# EAGLE board LED-Lamp-pth-v2 (EAGLE 7.6.0)
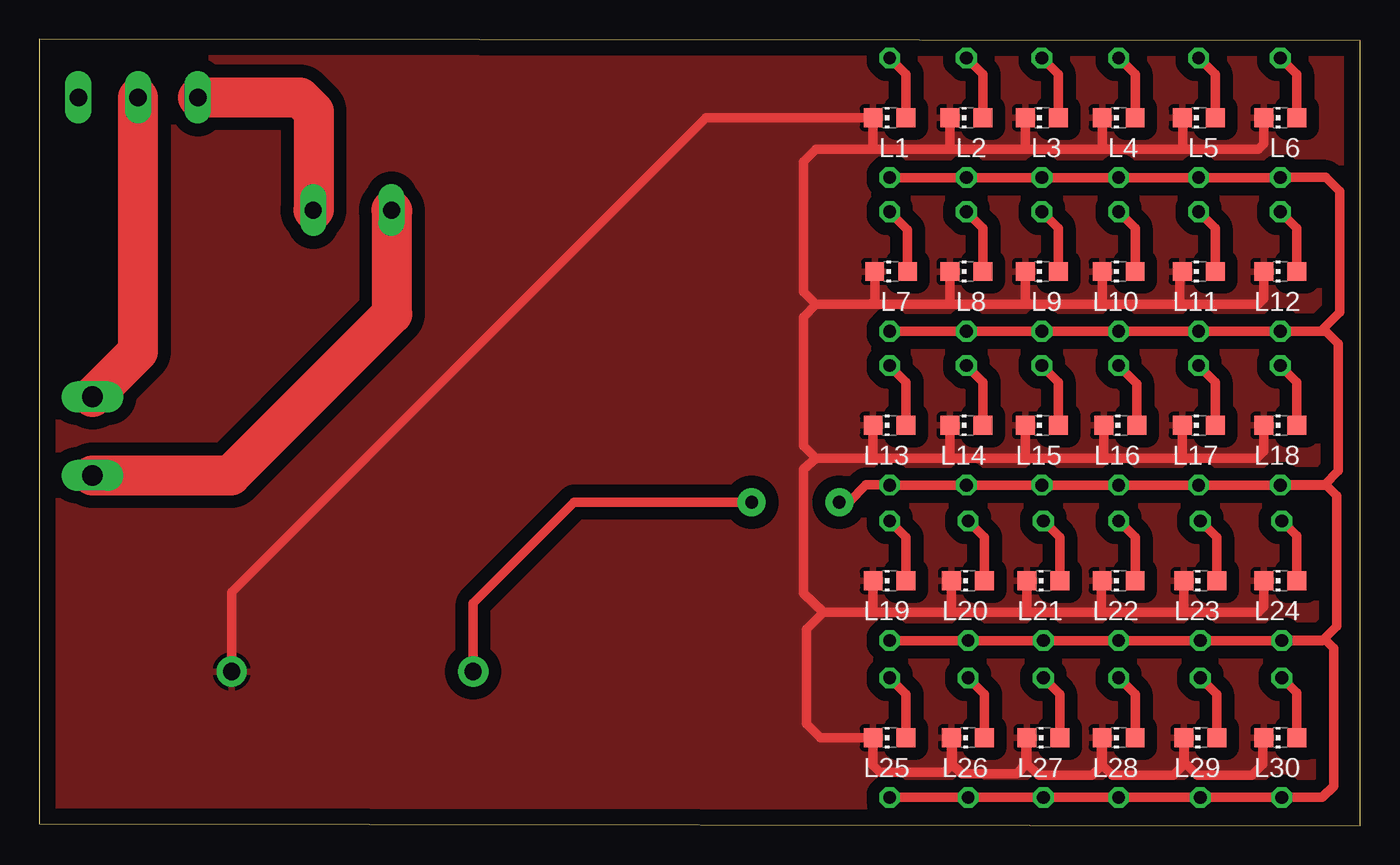
[diagram p0: board, top side]
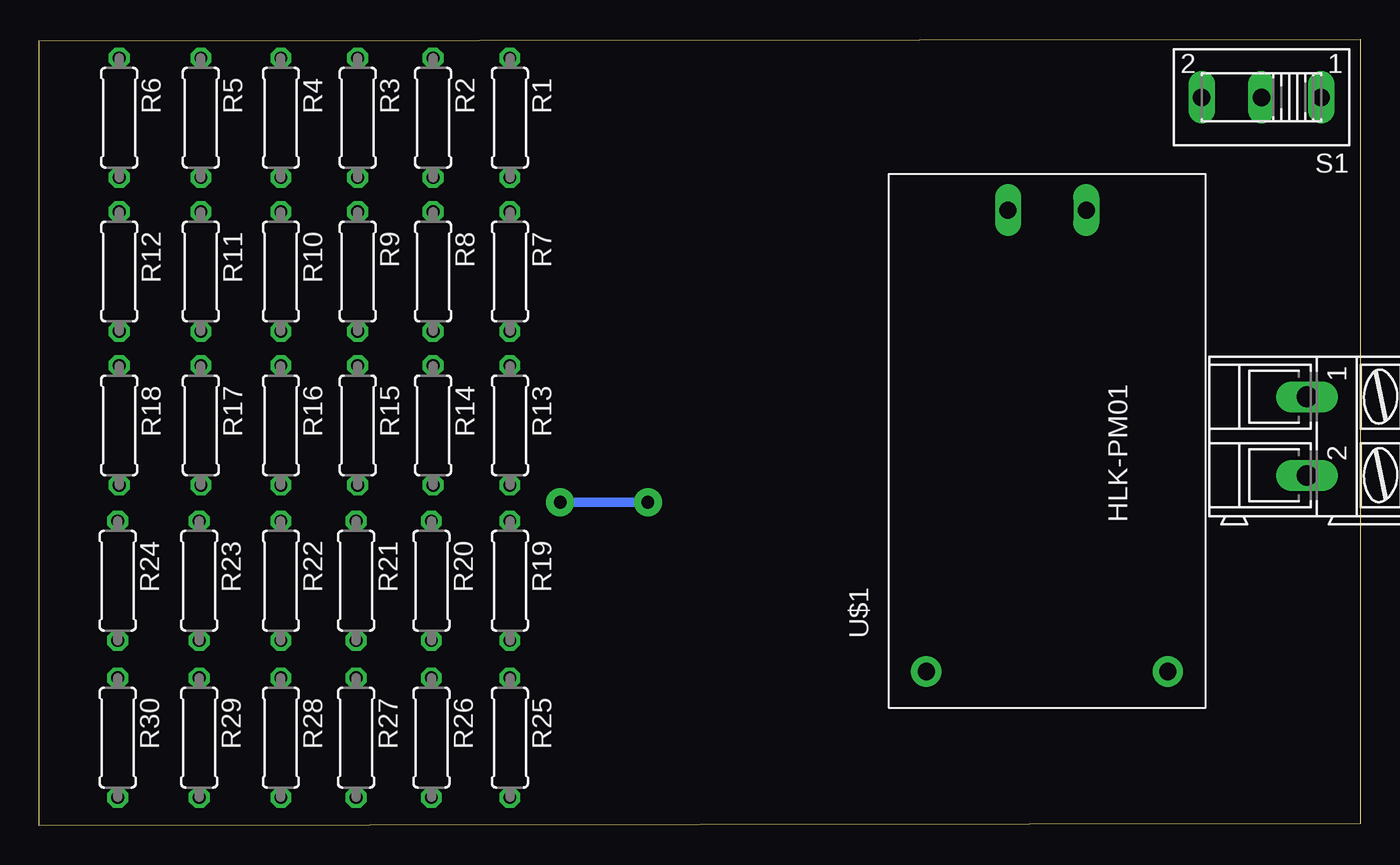
[diagram p1: board, bottom side, seen from below]

Size 84.2 x 50.1 mm. Coordinates in mm from the lower left corner, seen from the top.
Outline: 0,0.1 84.2,0 84.2,50 0,50.1 0,0.1
Copper layers (1*16): Top 0.035mm / dielectric 1.5mm / Bottom 0.035mm
Design rules "default": minimum track width 10mil, minimum drill 24mil, track to track 8mil, track to pad 8mil, pad to pad 8mil, via to via 8mil, smd to smd 8mil, copper to edge 40mil, drill to drill 8mil, minimum pad ring 10mil, minimum via ring 8mil, stop-mask expansion 4mil, vias tented up to drill 0mil, thermal gap 10mil

## Footprints (pad centres in the part's own frame; a part is rotated, then mirrored left to right if it is on the bottom)
CHIP-LED0805 = smd 1.2 x 1.2: A 0,-1.05; C 0,1.05
0207/7 = drill 0.813 octagon: 1 -3.81,0; 2 3.81,0
255SB = drill 1.118 long: 1 -3.81,0; 2 0,0; 3 3.81,0
HLK-PM01 = drill 1.1 pad 1.93: +5V 15.19,-7.76; GND 15.19,7.64 | drill 1.1 long: AC1 -14.21,2.44; AC2 -14.21,-2.56
AK300/2 = drill 1.321 long: 1 -2.515,0; 2 2.489,0

## Placement (x,y rotation side)
L1  [CHIP-LED0805]  54.2,45.1 90 top
L2  [CHIP-LED0805]  59.1,45.1 90 top
L3  [CHIP-LED0805]  63.9,45.1 90 top
L4  [CHIP-LED0805]  68.8,45.1 90 top
L5  [CHIP-LED0805]  73.9,45.1 90 top
L6  [CHIP-LED0805]  79.1,45.1 90 top
L7  [CHIP-LED0805]  54.3,35.3 90 top
L8  [CHIP-LED0805]  59.1,35.3 90 top
L9  [CHIP-LED0805]  63.9,35.3 90 top
L10  [CHIP-LED0805]  68.8,35.3 90 top
L11  [CHIP-LED0805]  73.9,35.3 90 top
L12  [CHIP-LED0805]  79.1,35.3 90 top
L13  [CHIP-LED0805]  54.2,25.5 90 top
L14  [CHIP-LED0805]  59.1,25.5 90 top
L15  [CHIP-LED0805]  63.9,25.5 90 top
L16  [CHIP-LED0805]  68.9,25.5 90 top
L17  [CHIP-LED0805]  73.9,25.5 90 top
L18  [CHIP-LED0805]  79.1,25.5 90 top
L19  [CHIP-LED0805]  54.2,15.6 90 top
L20  [CHIP-LED0805]  59.2,15.6 90 top
L21  [CHIP-LED0805]  64,15.6 90 top
L22  [CHIP-LED0805]  68.8,15.6 90 top
L23  [CHIP-LED0805]  74,15.6 90 top
L24  [CHIP-LED0805]  79.1,15.6 90 top
L25  [CHIP-LED0805]  54.2,5.6 90 top
L26  [CHIP-LED0805]  59.2,5.6 90 top
L27  [CHIP-LED0805]  64,5.6 90 top
L28  [CHIP-LED0805]  68.8,5.6 90 top
L29  [CHIP-LED0805]  74,5.6 90 top
L30  [CHIP-LED0805]  79.1,5.6 90 top
R1  [0207/7]  54.2,45.1 270 bottom
R2  [0207/7]  59.1,45.1 270 bottom
R3  [0207/7]  63.9,45.1 270 bottom
R4  [0207/7]  68.8,45.1 270 bottom
R5  [0207/7]  73.9,45.1 270 bottom
R6  [0207/7]  79.1,45.1 270 bottom
R7  [0207/7]  54.2,35.3 270 bottom
R8  [0207/7]  59.1,35.3 270 bottom
R9  [0207/7]  63.9,35.3 270 bottom
R10  [0207/7]  68.8,35.3 270 bottom
R11  [0207/7]  73.9,35.3 270 bottom
R12  [0207/7]  79.1,35.3 270 bottom
R13  [0207/7]  54.2,25.5 270 bottom
R14  [0207/7]  59.1,25.5 270 bottom
R15  [0207/7]  63.9,25.5 270 bottom
R16  [0207/7]  68.8,25.5 270 bottom
R17  [0207/7]  73.9,25.5 270 bottom
R18  [0207/7]  79.1,25.5 270 bottom
R19  [0207/7]  54.2,15.6 270 bottom
R20  [0207/7]  59.2,15.6 270 bottom
R21  [0207/7]  64,15.6 270 bottom
R22  [0207/7]  68.8,15.6 270 bottom
R23  [0207/7]  74,15.6 270 bottom
R24  [0207/7]  79.2,15.6 270 bottom
R25  [0207/7]  54.2,5.6 270 bottom
R26  [0207/7]  59.2,5.6 270 bottom
R27  [0207/7]  64,5.6 270 bottom
R28  [0207/7]  68.8,5.6 270 bottom
R29  [0207/7]  74,5.6 270 bottom
R30  [0207/7]  79.2,5.6 270 bottom
S1  [255SB]  6.3,46.4 180 bottom
U$1  HLK-PM01  [HLK-PM01]  19.9,25 270 bottom
X1  [AK300/2]  3.4,24.8 270 bottom

## Library data of the parts
L1-L30 = led
R1-R30 = rcl
S1 = switch
U$1 = HLK-PM01
X1 = con-ptr500; OC_FARNELL: unknown; OC_NEWARK: unknown

## Nets
GND: L1.C L2.C L3.C L4.C L5.C L6.C L7.C L8.C L9.C L10.C L11.C L12.C L13.C L14.C L15.C L16.C L17.C L18.C L19.C L20.C L21.C L22.C L23.C L24.C L25.C L26.C L27.C L28.C L29.C L30.C U$1.GND
N$1: L2.A R2.1
N$2: L3.A R3.1
N$3: L4.A R4.1
N$4: L5.A R5.1
N$5: L6.A R6.1
N$6: L7.A R7.1
N$7: L8.A R8.1
N$8: L9.A R9.1
N$9: L10.A R10.1
N$10: L11.A R11.1
N$11: L12.A R12.1
N$12: L13.A R13.1
N$13: L14.A R14.1
N$14: L15.A R15.1
N$15: L16.A R16.1
N$16: L17.A R17.1
N$17: L18.A R18.1
N$18: L19.A R19.1
N$19: L20.A R20.1
N$20: L21.A R21.1
N$21: L22.A R22.1
N$22: L23.A R23.1
N$23: L24.A R24.1
N$24: L25.A R25.1
N$25: L26.A R26.1
N$26: L27.A R27.1
N$27: S1.2 X1.1
N$28: L28.A R28.1
N$29: U$1.AC2 X1.2
N$30: L29.A R29.1
N$31: L1.A R1.1
N$32: L30.A R30.1
N$33: R1.2 R2.2 R3.2 R4.2 R5.2 R6.2 R7.2 R8.2 R9.2 R10.2 R11.2 R12.2 R13.2 R14.2 R15.2 R16.2 R17.2 R18.2 R19.2 R20.2 R21.2 R22.2 R23.2 R24.2 R25.2 R26.2 R27.2 R28.2 R29.2 R30.2 U$1.+5V
N$34: S1.3 U$1.AC1

## Tracks (layer width: path | path; a pad name or v marks a point on that pad's centre or on a via)
GND
  Top 0.61: L30.C 78,5.55 78,3.9 77.3,3.2 73.8,3.2 72.95,4.05 L29.C 73,5.55 73,3.9 72.3,3.2 68.4,3.2 67.75,3.85 L28.C 67.7,5.55 67.7,3.8 67.1,3.2 63.7,3.2 62.95,3.95 L27.C 62.9,5.55 62.9,3.9 62.3,3.3 58.8,3.3 58.15,3.95 L26.C 58.2,5.55 58.2,3.9 57.7,3.4 53.6,3.4 53.15,3.85 L25.C 49.8,5.6 48.9,6.5 48.9,12.5 50,13.6 | L24.C 78.05,13.95 77.7,13.6 73.1,13.6 | 73.1,13.6 67.8,13.6 | 67.8,13.6 63.1,13.6 | 63.1,13.6 58.1,13.6 | 58.1,13.6 53,13.6 | 53,13.6 50,13.6 | L19.C 53.15,13.75 53,13.6 | L20.C 58.15,13.65 58.1,13.6 | L21.C 62.95,13.75 63.1,13.6 | L22.C 67.75,15.55 67.7,15.5 67.7,13.7 67.8,13.6 | L23.C 72.95,13.75 73.1,13.6 | L18.C 78.05,23.85 77.6,23.4 72.9,23.4 | 72.9,23.4 67.6,23.4 | 67.6,23.4 62.9,23.4 | 62.9,23.4 58.2,23.4 | 58.2,23.4 53.1,23.4 | 53.1,23.4 49.5,23.4 | 49.5,23.4 48.7,22.7 48.7,14.8 50,13.6 | L13.C 53.15,23.45 53.1,23.4 | L14.C 58.05,23.55 58.2,23.4 | L15.C 62.85,23.45 62.9,23.4 | L16.C 67.85,23.65 67.6,23.4 | L17.C 72.85,23.45 72.9,23.4 | L12.C 78.05,33.55 77.7,33.2 72.8,33.2 | 72.8,33.2 67.9,33.2 | 67.9,33.2 63.1,33.2 | 63.1,33.2 58.1,33.2 | 58.1,33.2 53,33.2 | 53,33.2 49.5,33.2 | 49.5,33.2 48.7,32.4 48.7,24.2 49.5,23.4 | L7.C 53.25,33.45 53,33.2 | L8.C 58.05,33.25 58.1,33.2 | L9.C 62.85,33.45 63.1,33.2 | L10.C 67.75,33.35 67.9,33.2 | L11.C 72.8,35.3 72.7,35.2 72.7,33.3 72.8,33.2 | L6.C 78.05,43.45 77.7,43.1 73,43.1 | 73,43.1 68,43.1 | 68,43.1 63,43.1 | 63,43.1 58.2,43.1 | 58.2,43.1 53.3,43.1 | 53.3,43.1 49.5,43.1 48.7,42.3 48.7,34 49.5,33.2 | 53.3,43.1 53.15,43.25 L1.C 42.5,45.1 12.26,14.86 U$1.GND | L2.C 58.05,43.25 58.2,43.1 | L3.C 62.85,43.25 63,43.1 | L4.C 67.75,43.35 68,43.1 | L5.C 72.85,45.15 72.9,45.2 72.9,43.2 73,43.1
  pour Top (isolate 0.813): 0,0.1 84,0.1 84,50.1 0,50.1
N$1
  Top 0.61: R2.1 60.15,47.86 L2.A
N$2
  Top 0.61: R3.1 64.95,47.86 L3.A
N$3
  Top 0.61: R4.1 69.85,47.86 L4.A
N$4
  Top 0.61: R5.1 74.95,47.86 L5.A
N$5
  Top 0.61: R6.1 80.15,47.86 L6.A
N$6
  Top 0.61: R7.1 55.35,37.96 L7.A
N$7
  Top 0.61: R8.1 60.15,38.06 L8.A
N$8
  Top 0.61: R9.1 64.95,38.06 L9.A
N$9
  Top 0.61: R10.1 69.85,38.06 L10.A
N$10
  Top 0.61: R11.1 74.95,38.06 L11.A
N$11
  Top 0.61: R12.1 80.15,38.06 L12.A
N$12
  Top 0.61: R13.1 55.25,28.26 L13.A
N$13
  Top 0.61: R14.1 60.15,28.26 L14.A
N$14
  Top 0.61: R15.1 64.95,28.26 L15.A
N$15
  Top 0.61: R16.1 69.95,28.16 L16.A
N$16
  Top 0.61: R17.1 74.95,28.26 L17.A
N$17
  Top 0.61: R18.1 80.15,28.26 L18.A
N$18
  Top 0.61: R19.1 55.25,18.36 L19.A
N$19
  Top 0.61: R20.1 60.25,18.36 L20.A
N$20
  Top 0.61: R21.1 65.05,18.36 L21.A
N$21
  Top 0.61: R22.1 69.85,18.36 L22.A
N$22
  Top 0.61: R23.1 75.05,18.36 L23.A
N$23
  Top 0.61: R24.1 80.15,18.46 L24.A
N$24
  Top 0.61: R25.1 55.25,8.36 L25.A
N$25
  Top 0.61: R26.1 60.25,8.36 L26.A
N$26
  Top 0.61: R27.1 65.05,8.36 L27.A
N$27
  Top 2.54: X1.1 6.3,30.21 S1.2
N$28
  Top 0.61: R28.1 69.85,8.36 L28.A
N$29
  Top 2.54: X1.2 12.21,22.31 22.5,32.6 22.5,39.17 U$1.AC2
N$30
  Top 0.61: R29.1 75.05,8.36 L29.A
N$31
  Top 0.61: R1.1 55.25,47.86 L1.A
N$32
  Top 0.61: R30.1 80.15,8.46 L30.A
N$33  (via drill 0.8 pad 1.78)
  Top 0.61: R1.2 R2.2 R3.2 R4.2 R5.2 R6.2 82,41.3 82.9,40.4 82.9,32.7 81.69,31.49 R12.2 | R7.2 R8.2 R9.2 R10.2 R11.2 R12.2 | R18.2 R17.2 R16.2 R15.2 R14.2 R13.2 52.7,21.7 51.6,20.6 v51,20.6 | R19.2 R20.2 R21.2 R22.2 R23.2 R24.2 | R25.2 R26.2 R27.2 R28.2 R29.2 R30.2 81.79,1.79 82.5,2.5 82.5,11.3 82,11.8 R24.2 | R24.2 81.79,11.79 82.7,12.7 82.7,21 82,21.7 R18.2 | R18.2 81.89,21.69 82.8,22.6 82.8,30.7 82,31.5 R12.2 | v45.4,20.6 34.1,20.6 27.66,14.16 U$1.+5V
  Bottom 0.61: v45.4,20.6 v51,20.6
N$34
  Top 2.54: S1.3 16.6,46.4 17.5,45.5 17.5,39.25 U$1.AC1